# Altium PCB Conn_Batt_Blade_M.PcbDoc
Units mm, origin at the board's own origin, x right, y up, seen from the top; angles counter-clockwise.
Board outline 18 x 30 mm, 2 copper layers (Component Side, Solder Side), stack 1.57 mm thick; 2 components, 7 nets, 30 pads, 0 vias.
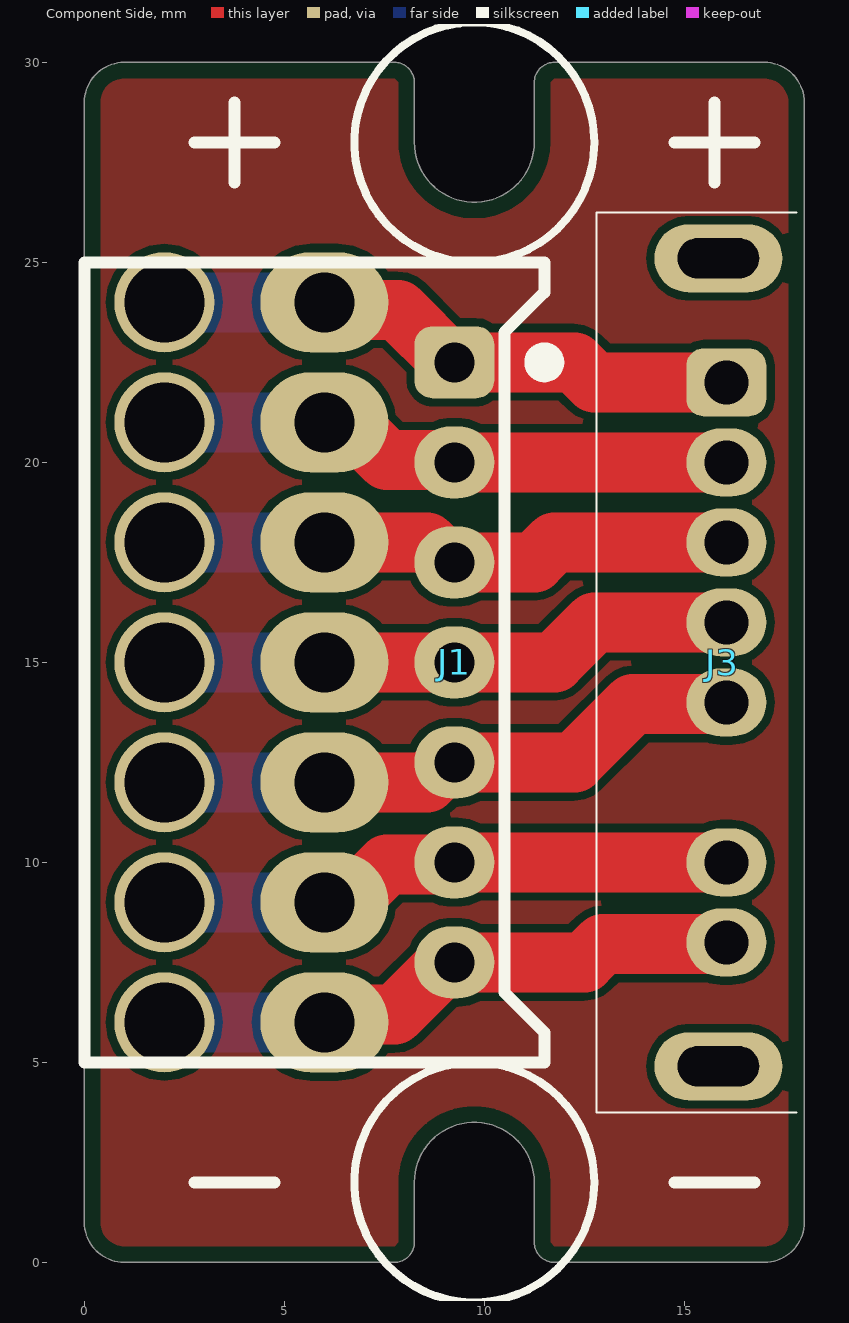
[diagram p0: Component Side view]
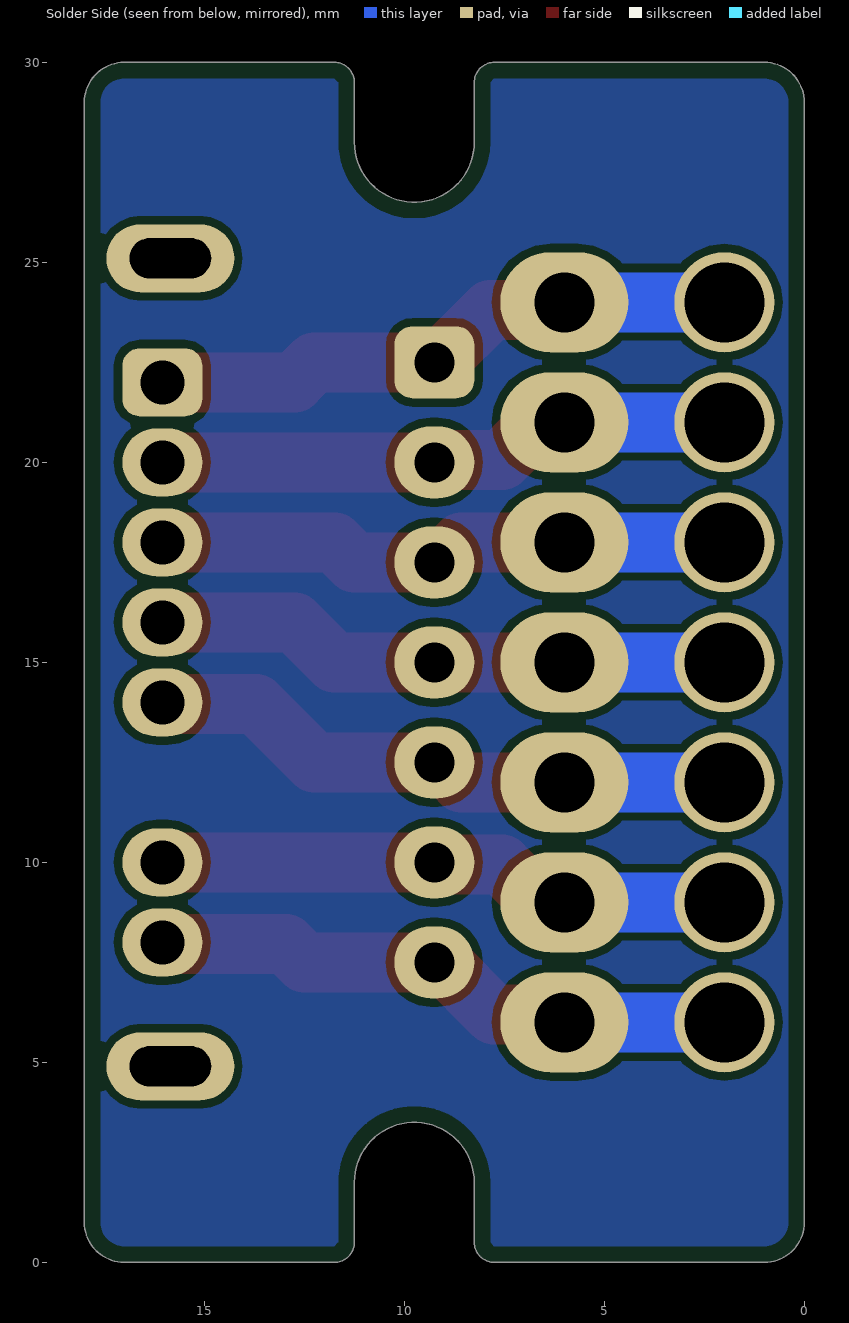
[diagram p1: Solder Side view, seen from below]

## Layer stack, top to bottom
Top Solder: solder mask 0.01, Solder Resist, Dk 3.5
Component Side: signal copper 0.035
Dielectric 1: core 1.5, FR-4, Dk 4.8
Solder Side: signal copper 0.035
Bottom Solder: solder mask 0.01, Solder Resist, Dk 3.5

## Board outline
1,0 cw(c1,1) 0,1 0,29 cw(c1,29) 1,30 7.75,30 cw(c7.75,29.5) 8.25,29.5 8.25,28 ccw(c9.75,28) 11.25,28 11.25,29.5 cw(c11.75,29.5) 11.75,30 17,30 cw(c17,29) 18,29 18,0.998 18,1 cw(c17,1) 17,0 11.75,0 cw(c11.75,0.5) 11.25,0.5 11.25,2 ccw(c9.75,2) 8.25,2 8.25,0.5 cw(c7.75,0.5) 7.75,0

## Design rules (kind name [scope] priority, off if disabled: settings)
AssemblyTestPointUsage [All] p1 off:
AssemblyTestpoint [All] p1 off: testpointundercomponent=TRUE minsize=1.016 maxsize=2.54 preferedsize=1.524 minholesize=0 maxholesize=1.016 preferedholesize=0.813 testpointgrid=0.025 usegrid=TRUE gridtolerance=0 allowsidetop=TRUE allowsidebottom=TRUE
BoardOutlineClearance [All] p1: gap=0.4 ignorepadtopadclearanceinfootprint=FALSE
Clearance Clearance_polygon [InPolygon] p1: gap=0.2 ignorepadtopadclearanceinfootprint=FALSE except(0: Arc-Hole Track-Hole SMDPad-Hole THPad-Hole Via-Hole Fill-Hole Poly-Hole Region-Hole Text-Hole)
Clearance Clearance_for_power_net [InNetClass('Power') vs InNet('GND')] p2: gap=0.2 ignorepadtopadclearanceinfootprint=TRUE except(0: Arc-Hole Track-Hole SMDPad-Hole THPad-Hole Via-Hole Fill-Hole Poly-Hole Region-Hole Text-Hole)
Clearance Clearance_general [All] p3: gap=0.127 ignorepadtopadclearanceinfootprint=FALSE except(0: Arc-Hole Track-Hole SMDPad-Hole THPad-Hole Via-Hole Fill-Hole Poly-Hole Region-Hole Text-Hole)
ComponentClearance [All] p1: gap=0 collisioncheckmode=3 verticalgap=0 showdistances=FALSE
DiffPairsRouting [All] p1 off: maxlimit=0.254 minlimit=0.127 mostfreqgap=0.254 toplayer_minwidth=0.381 toplayer_maxwidth=0.381 toplayer_prefwidth=0.381 bottomlayer_minwidth=0.381 bottomlayer_maxwidth=0.381 bottomlayer_prefwidth=0.381 maxuncoupledlength=12.7
FabricationTestPointUsage TestPointUsage [All] p1 off: valid=0 allowmultiple=FALSE
FabricationTestpoint Testpoint [All] p1 off: side=3 testpointundercomponent=TRUE minsize=1.016 maxsize=2.54 preferedsize=1.524 minholesize=0 maxholesize=1.016 preferedholesize=0.813 testpointgrid=0.025 allowsidetop=TRUE allowsidebottom=TRUE usegrid=TRUE gridtolerance=0
FanoutControl Fanout_BGA [IsBGA] p1 off: bgadir=Out bgaviamode=Centered fanoutstyle=Auto fanoutdirection=Alternating viagrid=0.025 // Fanout_BGA (Default Rule)
FanoutControl Fanout_LCC [IsLCC] p2 off: bgadir=Out bgaviamode=Centered fanoutstyle=Auto fanoutdirection=Alternating viagrid=0.025 // Fanout_LCC (Default Rule)
FanoutControl Fanout_SOIC [IsSOIC] p3 off: bgadir=Out bgaviamode=Centered fanoutstyle=Auto fanoutdirection=Alternating viagrid=0.025 // Fanout_SOIC (Default Rule)
FanoutControl Fanout_Small [(CompPinCount < 5)] p4 off: bgadir=Out bgaviamode=Centered fanoutstyle=Auto fanoutdirection=OutThenIn viagrid=0.025 // Fanout_Small (Default Rule)
FanoutControl Fanout_Default [All] p5 off: bgadir=Out bgaviamode=Centered fanoutstyle=Auto fanoutdirection=Alternating viagrid=0.025 // Fanout_Default (Default Rule)
Height [All] p1: minheight=0 maxheight=50 prefheight=10
HoleSize [All] p1: absolutevalues=TRUE maxlimit=6.3 minlimit=0.2 maxpercent=80.000 minpercent=20.000
HoleToHoleClearance [All] p1: gap=0.4 allowstackedmicrovias=TRUE
MinimumAnnularRing [All] p1: minimumring=0.076
MinimumSolderMaskSliver [All] p1: minsoldermaskwidth=0.15
MinimumSolderMaskSliver SilkscreenOverComponentPads [All] p2 off: minsoldermaskwidth=0.254
NetAntennae [All] p1 off: netantennaetolerance=0
PlaneClearance [All] p1: clearance=0.5
PlaneConnect [All] p1: planeconnectstyle=Relief reliefexpansion=0.4 reliefentries=4 reliefconductorwidth=0.3 reliefairgap=0.2
PolygonConnect [All] p1: thpad.connectstyle=Relief thpad.reliefconductorwidth=0.25 thpad.reliefentries=4 thpad.polygonreliefangle="90 Angle" thpad.airgapwidth=0.254 smdpad.connectstyle=Relief smdpad.reliefconductorwidth=0.25 smdpad.reliefentries=4 smdpad.polygonreliefangle="90 Angle" smdpad.airgapwidth=0.254 via.connectstyle=Direct via.reliefconductorwidth=0.25 via.reliefentries=4 via.polygonreliefangle="90 Angle" via.airgapwidth=0.254
PolygonConnect PolygonConnect_Via_GND [All vs (InNet('GND') AND  IsVia)] p2: thpad.connectstyle=Relief thpad.reliefconductorwidth=0.25 thpad.reliefentries=4 thpad.polygonreliefangle="90 Angle" thpad.airgapwidth=0.254 smdpad.connectstyle=Relief smdpad.reliefconductorwidth=0.25 smdpad.reliefentries=4 smdpad.polygonreliefangle="90 Angle" smdpad.airgapwidth=0.254 via.connectstyle=Direct via.reliefconductorwidth=0.25 via.reliefentries=4 via.polygonreliefangle="90 Angle" via.airgapwidth=0.254
PolygonConnect PolygonConnect_Via_Power [(InNetClass('Power')  AND  IsVia)] p3: connectstyle=Relief reliefconductorwidth=0.25 reliefentries=4 polygonreliefangle="90 Angle" airgapwidth=0.254
RoutingCorners [All] p1: cornerstyle=45-Degree minsetback=1.5 maxsetback=2.54
RoutingVias [All] p1: holewidth=0.3 width=0.6 viastyle="Through Hole" minholewidth=0.3 minwidth=0.6 maxholewidth=0.3 maxwidth=1
SilkToSilkClearance [All] p1 off: silktosilkclearance=0.1
SolderMaskExpansion [All] p1: expansion=0.075 istentingtop=FALSE
Width [All] p1: maxlimit=15 minlimit=0.127 preferedwidth=0.5
10 further rules are at their usual default settings.

## Components (designator, comment, footprint, x,y, rotation, side; value= is the part's Value field where it differs from the comment)
J1 "Comment" CONN_JST_S7B-XH-A 9.25,15 r270 top
J3 "Comment" Conn_TE_1-1827654-1 16.05,15 r90 top

## Footprints (in the part's own frame and the unit in brackets; to place one, negate y for a bottom-side part, rotate by r counter-clockwise, add the part's x,y. Pads: shape width x height; smd on the part's side, far side on the other; paste and mask are expansions set on the pad)
CONN_JST_S7B-XH-A [mm]
  rrect50% 1.8x2 hole 1: 1(-7.5,0)
  oval 1.8x2 hole 1: 2(-5,0) 3(-2.5,0) 4(0,0) 5(2.5,0) 6(5,0) 7(7.5,0)
  silkscreen extent -10,-9.25 10,2.5, body extent -9.95,-9.2 9.95,2.3, height 6.1
Conn_TE_1-1827654-1 [mm]
  rrect50% 1.7x2 hole 1.1 mask+0.05: 1(7,0)
  oval 1.7x2 hole 1.1: 2(5,0) 3(3,0) 4(1,0) 5(-1,0) 6(-5,0) 7(-7,0)
  rrect100% 1.7x3.2 hole 1 slot 2.04 at 90 deg mask+0.05: 8(-10.1,0.2) 9(10.1,0.2)
  silkscreen extent -11.25,-1.75 11.25,3.25, body extent -11.3,-8.1 11.3,3.3, height 4

## Free pads (board coordinates)
  round 2.5 hole 2: 3(2,6) 3(2,9) 3(2,12) 3(2,15) 3(2,18) 3(2,21) 3(2,24)
  oval 3.2x2.5 hole 1.5: 3(6,6) 3(6,9) 3(6,12) 3(6,15) 3(6,18) 3(6,21) 3(6,24)

## Nets (pads, with @x,y where several pads share a name; then routed paths per layer and width w, separated by ;. In a path a pad name is that pad's centre, name@x,y a point inside that pad or via, vN(x,y) a via of type N, cw(c..) or ccw(c..) an arc to the next point about the centre after c; other vN are vias at no path point)
B1_1_C3: J1.1 J3.1 pad.3@2,24 pad.3@6,24 | length 14.9
  Component Side w1.5: pad.3@6,24 6.191,23.809 7.841,23.809 9.15,22.5 J1.1 12.25,22.5 12.75,22 J3.1 J3.1@16.025,22.025
  Solder Side w1.5: pad.3@2,24 pad.3@6,24
B1_2_C1: J1.3 J3.3 pad.3@2,18 pad.3@6,18 | length 14.5
  Component Side w1.5: pad.3@6,18 8.569,18 9.069,17.5 J1.3 11.25,17.5 11.75,18 J3.3
  Solder Side w1.5: pad.3@2,18 pad.3@6,18
B1_2_C2: J1.2 J3.2 pad.3@2,21 pad.3@6,21 | length 14.5
  Component Side w1.5: pad.3@6,21 6.621,21 7.563,20.057 9.193,20.057 J1.2 J3.2 J3.2@16.025,20.025
  Solder Side w1.5: pad.3@2,21 pad.3@6,21
B1_4_GND: J1.4 J3.4 pad.3@2,15 pad.3@6,15 | length 14.5
  Component Side w1.5: pad.3@6,15 J1.4 11.75,15 12.75,16 J3.4
  Solder Side w1.5: pad.3@2,15 pad.3@6,15
B2_2_C2: J1.5 J3.5 pad.3@2,12 pad.3@6,12 | length 14.9
  Component Side w1.5: pad.3@6,12 8.569,12 9.069,12.5 J1.5 12.25,12.5 13.712,13.962 16.012,13.962 J3.5 J3.5@16.025,13.975
  Solder Side w1.5: pad.3@2,12 pad.3@6,12
B2_3_C1: J1.6 J3.6 pad.3@2,9 pad.3@6,9 | length 14.5
  Component Side w1.5: pad.3@6,9 6.621,9 7.563,9.943 9.193,9.943 J1.6 J3.6
  Solder Side w1.5: pad.3@2,9 pad.3@6,9
B2_4_GND: J1.7 J3.7 pad.3@2,6 pad.3@6,6 | length 14.9
  Component Side w1.5: pad.3@6,6 6.191,6.191 7.76,6.191 9.069,7.5 J1.7 12.5,7.5 12.962,7.962 16.012,7.962 J3.7
  Solder Side w1.5: pad.3@2,6 pad.3@6,6
pads on no net: J3.8 J3.9

## Polygon pours and split planes (outlines as drawn)
no net on Solder Side "NONET_L02_P001" (solid, pour order 1): 0,30 0,0 18,0 18,30
no net on Component Side "NONET_L01_P000" (solid, pour order 0): 0,30 18,30 18,0 0,0

## Silkscreen, mask and mechanical layers (free items; w line width, h text height)
Top Overlay:
  circle w0.2: c9.75,28 r3
  circle w0.2: c9.75,2 r3
  lines w0.3: 2.75,2 4.75,2 ; 2.75,28 4.75,28 ; 3.75,27 3.75,29 ; 14.75,2 16.75,2 ; 14.75,28 16.75,28 ; 15.75,27 15.75,29
Board Outline:
  lines w0.1: 18,0.998 18,29 ccw(c17,29) 17,30 11.75,30 ccw(c11.75,29.5) 11.25,29.5 11.25,28 cw(c9.75,28) 8.25,28 8.25,29.5 ccw(c7.75,29.5) 7.75,30 1,30 ccw(c1,29) 0,29 0,1 ccw(c1,1) 1,0 7.75,0 ccw(c7.75,0.5) 8.25,0.5 8.25,2 cw(c9.75,2) 11.25,2 11.25,0.5 ccw(c11.75,0.5) 11.75,0 17,0 ccw(c17,1) 18,1

## Dimensions
0,29 to 18,29 on Dimension
1,0 to 1,30 on Dimension

## Text inside footprints (layer, text, board x,y; h text height)
J3: Top Assembly "PCB EDGE" at 19.3,12.25 h1.2 r90